# Altium PCB MiniPCB.PcbDoc (part 1 of 2)
Units mil, origin at the board's own origin, x right, y up, seen from the top; angles counter-clockwise.
Board outline 669.97 x 951.03 mil, 4 copper layers (Top Layer, GND, PWR, Bottom Layer), stack 30.2 mil thick; 100 components, 54 nets, 382 pads, 151 vias.
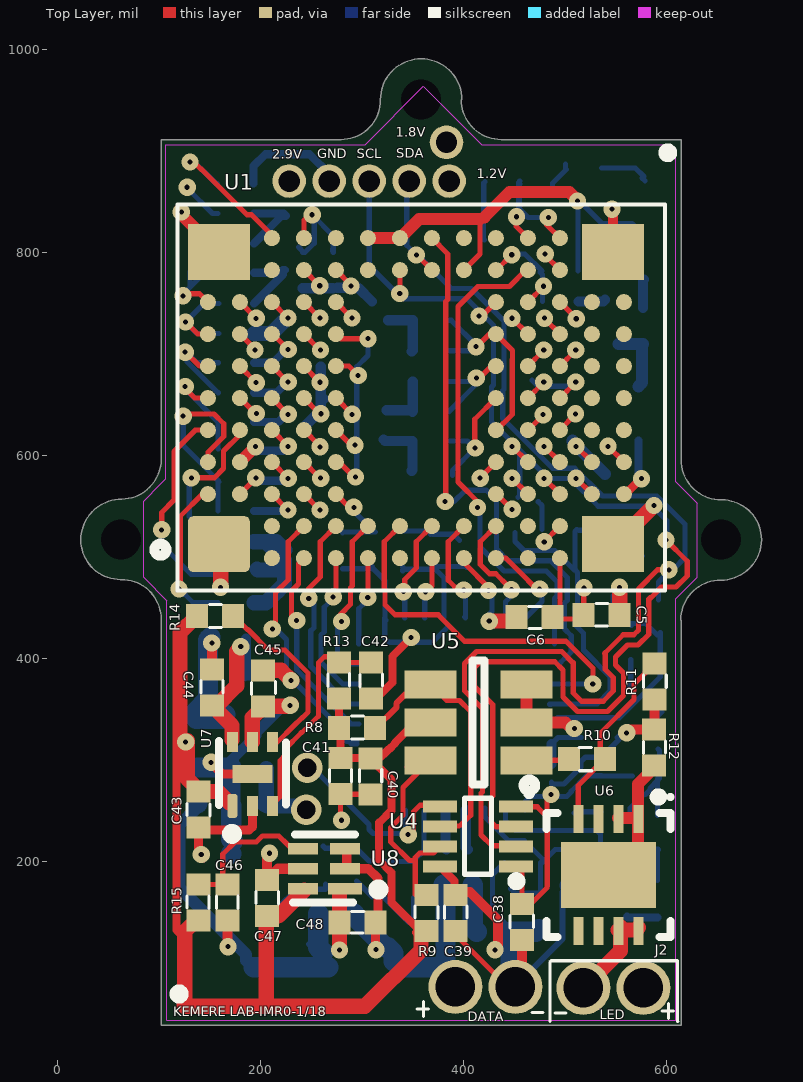
[diagram p0: Top Layer view]
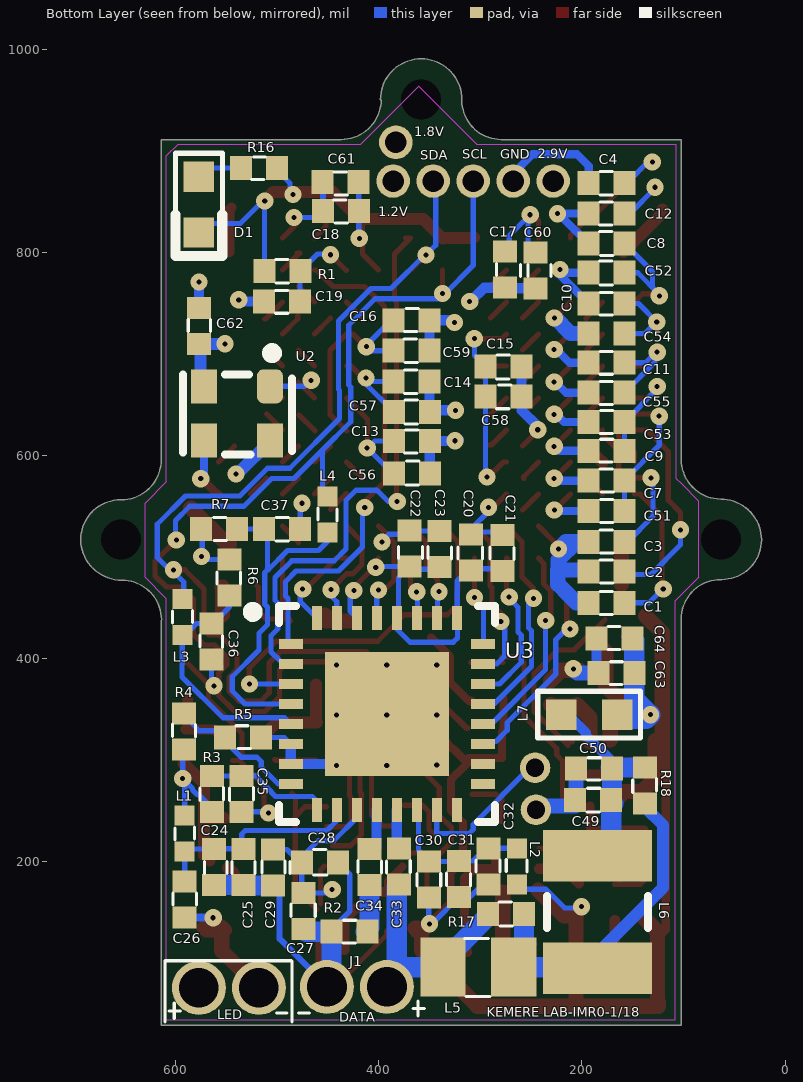
[diagram p1: Bottom Layer view, seen from below]
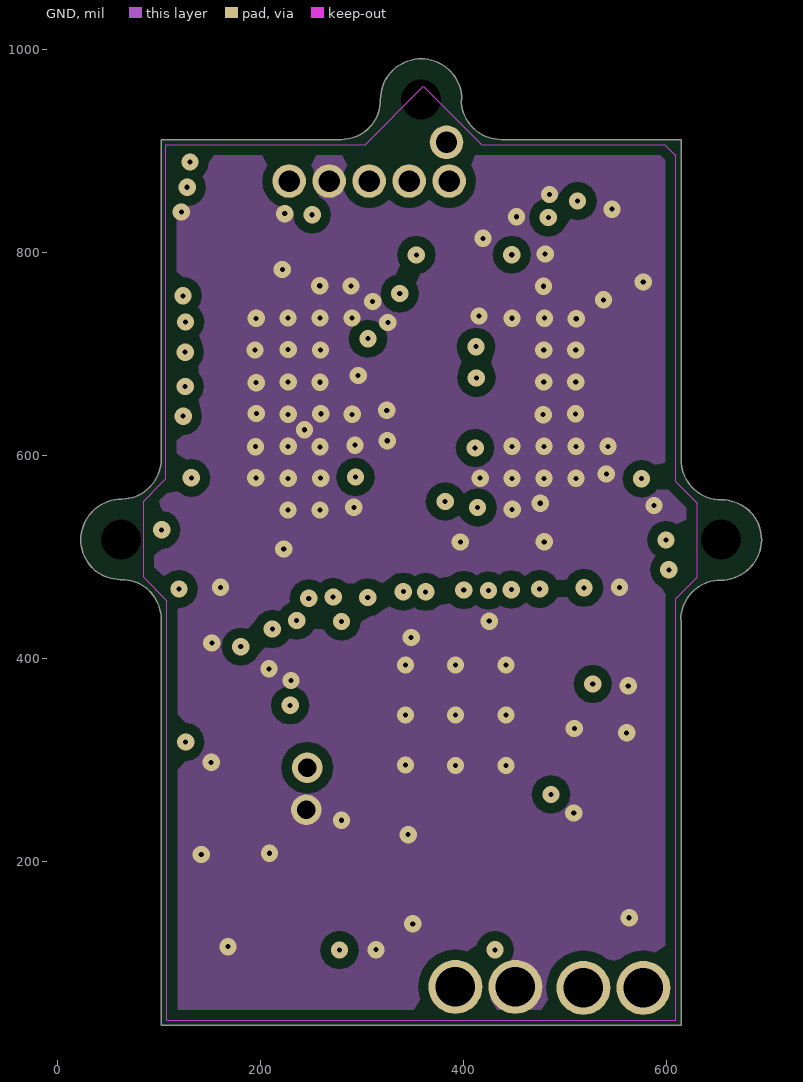
[diagram p2: GND]
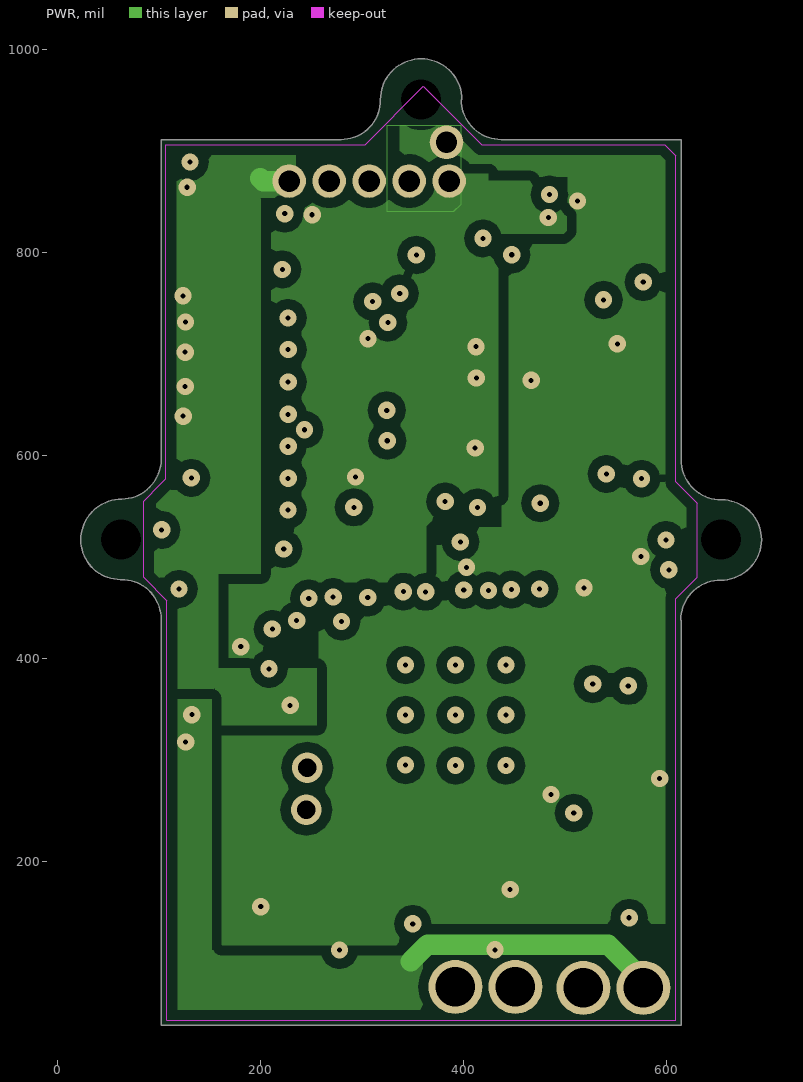
[diagram p3: PWR]

## Layer stack, top to bottom
Top Solder: solder mask 0.4, Solder Resist, Dk 3.5
Top Layer: signal copper 1.4
Dielectric1: core 6, FR-4 High TG, Dk 4.8
GND: signal copper 1.4
Dielectric2: prepreg 12.6, FR-4 High TG, Dk 4.8
PWR: signal copper 1.4
Dielectric3: core 6, FR-4 High TG, Dk 4.8
Bottom Layer: signal copper 1.4
Bottom Solder: solder mask 0.4, Solder Resist, Dk 3.5

## Board outline
62.32,477.95 63.33,477.95 cw(c63.33,438.92) 102.36,438.92 102.36,261.41 102.36,39.42 614.17,39.42 614.17,261.42 614.17,437.42 613.84,438.24 cw(c652.86,438.24) 652.86,477.27 ccw(c653.03,517.49) 693.25,517.32 ccw(c654.22,517.32) 654.22,556.35 653.54,556.35 cw(c653.54,595.72) 614.17,595.72 614.17,911.02 437.01,911.02 cw(c437.01,950.39) 397.64,950.39 398.32,950.4 ccw(c358.27,950.4) 358.27,990.45 ccw(c358.27,950.39) 318.21,950.39 318.21,949.71 cw(c279.53,949.71) 279.53,911.02 102.36,911.02 102.36,596.46 cw(c62.94,596.45) 63.5,557.03 ccw(c63.41,516.9) 23.28,516.98 ccw(c62.32,516.98)

## Design rules (kind name [scope] priority, off if disabled: settings)
Clearance "Polygon Pour Clearance" [InPolygon] p1: gap=10 ignorepadtopadclearanceinfootprint=FALSE
Clearance Clearance_1 [All] p2: gap=0 ignorepadtopadclearanceinfootprint=FALSE except(5: SMDPad-SMDPad SMDPad-THPad SMDPad-Via SMDPad-Hole THPad-THPad THPad-Via THPad-Hole Via-Via Via-Hole)
Clearance [All] p3: gap=5 ignorepadtopadclearanceinfootprint=FALSE except(10: Arc-Poly Track-Poly SMDPad-Poly THPad-Poly Via-Poly Fill-Poly Poly-Poly Poly-Region Poly-Hole)
ComponentClearance [All] p1: gap=5 collisioncheckmode=3 verticalgap=5 showdistances=TRUE
HoleSize [All] p1: absolutevalues=TRUE maxlimit=100 minlimit=5 maxpercent=80.000 minpercent=20.000
MatchedLengths [InNetClass('DIN[0..11]')] p1 off: tolerance=39.37 checknetsindiffpair=FALSE checkdiffpairvsdiffpair=TRUE checkxsignals=TRUE checkothers=TRUE
MinimumAnnularRing "PWR Annular Ring" [OnLayer('PWR')] p1: minimumring=7
MinimumAnnularRing "Layer Annular Ring" [OnLayer('GND')] p2: minimumring=7
MinimumAnnularRing [All] p3: minimumring=5
MinimumSolderMaskSliver [All] p1 off: minsoldermaskwidth=5
PolygonConnect [All] p1: thpad.connectstyle=Direct thpad.reliefconductorwidth=10 thpad.reliefentries=4 thpad.polygonreliefangle="90 Angle" thpad.airgapwidth=10 smdpad.connectstyle=Relief smdpad.reliefconductorwidth=10 smdpad.reliefentries=4 smdpad.polygonreliefangle="90 Angle" smdpad.airgapwidth=10 via.connectstyle=Direct via.reliefconductorwidth=10 via.reliefentries=4 via.polygonreliefangle="90 Angle" via.airgapwidth=10
RoomDefinition Serializer [InComponentClass('Serializer')] p1 off: confinementstyle=ConfineIn formatcopy=TRUE lockcomponents=FALSE outline -3327,-1970 -1327,-1970 -1327,-970 -3327,-970
RoomDefinition Power [InComponentClass('Power')] p2 off: confinementstyle=ConfineIn formatcopy=TRUE lockcomponents=FALSE outline -3327,-1970 -1327,-1970 -1327,-970 -3327,-970
RoomDefinition "LED Driver" [InComponentClass('LED Driver')] p3 off: confinementstyle=ConfineIn formatcopy=TRUE lockcomponents=FALSE outline -3327,-1970 -1327,-1970 -1327,-970 -3327,-970
RoomDefinition "CMOS Sensor" [InComponentClass('CMOS Sensor')] p4 off: confinementstyle=ConfineIn formatcopy=TRUE lockcomponents=FALSE outline -3327,-1970 -1327,-1970 -1327,-970 -3327,-970
RoutingVias [All] p1: holewidth=10 width=22 viastyle="Through Hole" minholewidth=5 minwidth=14 maxholewidth=28 maxwidth=50
SilkToSolderMaskClearance [IsPad] p1 off: minsilkscreentomaskgap=1 clearancetoexposedcopper=TRUE
SolderMaskExpansion [All] p1: expansion=1
UnConnectedPin [All] p1:
UnpouredPolygon [All] p1: allowunpoured=TRUE
Width [All] p1: maxlimit=100 minlimit=5 preferedwidth=10 minimp=50.000000 maximp=50.000000 favimp=50.000000
25 further rules are at their usual default settings.

## Classes and differential pairs
net class DIN[0..11]: DIN0 DIN1 DIN2 DIN3 DIN4 DIN5 DIN6 DIN7 DIN8 DIN9 DIN10 DIN11
component class Serializer: C20 C21 C22 C23 C24 C25 C26 C27 C28 C29 C30 C31 C32 C33 C34 C35 C36 C37 C49 C50 C63 C64 J1 L1 L2 L3 L4 L5 L6 L7 R2 R3 R4 R5 R6 R7 R17 R18 U3
component class Power: C42 C43 C44 C45 C46 C47 C48 D1 R13 R14 R15 R16 U7 U8
component class "LED Driver": C38 C39 C40 J2 R8 R9 R10 R11 R12 U4 U5 U6
component class "CMOS Sensor": C1 C2 C3 C4 C5 C6 C7 C8 C9 C10 C11 C12 C13 C14 C15 C16 C17 C18 C19 C51 C52 C53 C54 C55 C56 C57 C58 C59 C60 C61 C62 R1 U1 U2

## Components (designator, comment, footprint, x,y, rotation, side; value= is the part's Value field where it differs from the comment)
C1 "1uF" "SMD CAP 0402" 176,455 r180 bottom value=C?
C2 ".1uF" "SMD CAP 0402" 175.72,486 r180 bottom value=C?
C3 "1uF" "SMD CAP 0402" 175.72,515 r180 bottom value=C?
C4 ".22uF" "SMD CAP 0402" 175.72,868 r180 bottom value=C?
C5 ".01uF" "SMD CAP 0402" 536,443 r180 top value=C?
C6 "10uF" "SMD CAP 0402" 470,441 r0 top value=C?
C7 "4.7uF" "SMD CAP 0402" 175.98,575.2 r180 bottom value=C?
C8 "4.7uF" "SMD CAP 0402" 175.98,808.66 r180 bottom value=C?
C9 "4.7uF" "SMD CAP 0402" 176.02,604.32 r180 bottom value=C?
C10 "4.7uF" "SMD CAP 0402" 175.98,749.61 r180 bottom value=C?
C11 "1uF" "SMD CAP 0402" 175.98,691.34 r180 bottom value=C?
C12 "10uF" "SMD CAP 0402" 175.98,838.19 r180 bottom value=C?
C13 "1uF" "SMD CAP 0402" 367.52,614.17 r180 bottom value=C?
C14 "1uF" "SMD CAP 0402" 367.72,672.83 r180 bottom value=C?
C15 "4.7uF" "SMD CAP 0402" 277.17,687.4 r180 bottom value=C?
C16 "4.7uF" "SMD CAP 0402" 367.72,733.07 r180 bottom value=C?
C17 "4.7uF" "SMD CAP 0402" 275.92,782.9 r270 bottom value=C?
C18 "4.7uF" "SMD CAP 0402" 437.4,840.55 r180 bottom value=C?
C19 "1uF" "SMD CAP 0402" 495.28,751.57 r180 bottom value=C?
C20 "0.1uF" "SMD CAP 0402" 309.45,504.72 r90 bottom value=C?
C21 "0.01uF" "SMD CAP 0402" 278.35,503.94 r90 bottom value=C?
C22 "0.1uF" "SMD CAP 0402" 369.5,508.5 r90 bottom value=C?
C23 "0.01uF" "SMD CAP 0402" 340,508 r90 bottom value=C?
C24 "0.1uF" "SMD CAP 0402" 562.01,194.94 r270 bottom value=C?
C25 "0.01uF" "SMD CAP 0402" 533,195 r270 bottom value=C?
C26 "4.7uF" "SMD CAP 0402" 591,163 r270 bottom value=C?
C27 "0.1uF" "SMD CAP 0402" 474.26,151.77 r270 bottom value=C?
C28 "0.01uF" "SMD CAP 0402" 457.99,199.45 r180 bottom value=C?
C29 "4.7uF" "SMD CAP 0402" 504.2,194.54 r270 bottom value=C?
C30 "0.1uF" "SMD CAP 0402" 350.79,182.68 r270 bottom value=C?
C31 "0.01uF" "SMD CAP 0402" 321.26,183.07 r270 bottom value=C?
C32 "22uF" "SMD CAP 0402" 292.13,195.67 r270 bottom value=C?
C33 "0.1uF" "SMD CAP 0402" 380.32,195.28 r270 bottom value=C?
C34 "0.047uF" "SMD CAP 0402" 409.06,194.88 r270 bottom value=C?
C35 "1uF" "SMD CAP 0402" 535,267 r270 bottom value=C?
C36 ".01uF" "SMD CAP 0402" 564.5,417 r270 bottom value=C?
C37 ".01uF" "SMD CAP 0402" 495,527.5 r180 bottom value=C?
C38 ".1uF" "SMD CAP 0402" 457.4,140.8 r90 top value=C?
C39 "1uF" "SMD CAP 0402" 392.13,149.61 r270 top value=C?
C40 ".1uF" "SMD CAP 0402" 308.27,284.25 r270 top value=C?
C41 "1uF" "SMD CAP 0402" 278.74,284.65 r270 top value=C?
C42 "1uF" "SMD CAP 0402" 309.06,378.74 r270 top value=C?
C43 "4.7uF" "SMD CAP 0402" 138.98,251.57 r270 top value=C?
C44 "1uF" "SMD CAP 0402" 152.36,371.65 r90 top value=C?
C45 "1uF" "SMD CAP 0402" 202.52,370.83 r90 top value=C?
C46 "1uF" "SMD CAP 0402" 167.72,160.24 r270 top value=C?
C47 "4.7uF" "SMD CAP 0402" 206.69,164.57 r270 top value=C?
C48 "1uF" "SMD CAP 0402" 295.67,140.55 r180 top value=C?
C49 "4.7uF" "SMD CAP 0402" 189,261 r0 bottom value=C?
C50 ".1uF" "SMD CAP 0402" 188.19,291.73 r0 bottom value=C?
C51 ".1uF" "SMD CAP 0402" 175.98,545.28 r180 bottom value=C?
C52 ".1uF" "SMD CAP 0402" 175.98,779.92 r180 bottom value=C?
C53 ".1uF" "SMD CAP 0402" 175.98,633.07 r180 bottom value=C?
C54 ".1uF" "SMD CAP 0402" 175.98,720.08 r180 bottom value=C?
C55 ".1uF" "SMD CAP 0402" 175.98,661.81 r180 bottom value=C?
C56 ".01uF" "SMD CAP 0402" 367.36,582.48 r180 bottom value=C?
C57 ".01uF" "SMD CAP 0402" 367.44,642.87 r180 bottom value=C?
C58 ".1uF" "SMD CAP 0402" 277.17,657.87 r180 bottom value=C?
C59 ".1uF" "SMD CAP 0402" 367.72,703.15 r180 bottom value=C?
C60 ".1uF" "SMD CAP 0402" 245.72,782.18 r270 bottom value=C?
C61 ".1uF" "SMD CAP 0402" 437.72,869.41 r180 bottom value=C?
C62 ".01uF" "SMD CAP 0402" 576.77,727.56 r270 bottom value=C?
C63 "4.7uF" "SMD CAP 0402" 166.14,385.83 r0 bottom value=C?
C64 ".1uF" "SMD CAP 0402" 168,420 r0 bottom value=C?
D1 "LED 0603" LED_0603 577,847 r90 bottom
J1 "Coax Connector" "Coax Direct Solder ThroughHoles" 391.94,77 r270 bottom
J2 "Coax Connector" "Coax Direct Solder ThroughHoles" 577,76 r270 top
L1 "Ferrite Bead" "Ferrite Bead 402" 591,228 r270 bottom
L2 "Ferrite Bead" "Ferrite Bead 402" 264.17,195.67 r270 bottom
L3 "Ferrite Bead" "Ferrite Bead 402" 593,441 r270 bottom
L4 "Ferrite Bead" "Ferrite Bead 402" 450.5,542 r270 bottom
L5 "Ferrite Bead" CIG21L4R7MNE 301.97,96.46 r180 bottom
L6 "Ferrite Bead" CBC3225T101MR 184.65,150.79 r90 bottom
L7 "Ferrite Bead" BLM18KG601SN1D 193,345 r180 bottom
R1 "250K" "SMD RES 0402" 494.88,781.5 r0 bottom value=?
R2 "49.9" "SMD RES 0402" 428.87,131.31 r0 bottom value=?
R3 "100k" "SMD RES 0402" 564,267 r90 bottom value=?
R4 "10k" "SMD RES 0402" 591.5,328.5 r270 bottom value=?
R5 "100k" "SMD RES 0402" 533.5,322.5 r0 bottom value=?
R6 "1k" "SMD RES 0402" 547,480 r90 bottom value=?
R7 "1k" "SMD RES 0402" 557.13,527.57 r0 bottom value=?
R8 "1K" "SMD RES 0402" 294.88,331.89 r180 top value=?
R9 "1K" "SMD RES 0402" 363.39,149.61 r270 top value=?
R10 "4.02K" "SMD RES 0402" 521.34,301.41 r0 top value=?
R11 "1K" "SMD RES 0402" 588,377.5 r90 top value=?
R12 "10" "SMD RES 0402" 587.5,312.5 r270 top value=?
R13 "100k" "SMD RES 0402" 277.56,378.35 r270 top value=?
R14 "100k" "SMD RES 0402" 155.12,442.13 r180 top value=?
R15 "10k" "SMD RES 0402" 138.98,160.24 r270 top value=?
R16 "500" "SMD RES 0402" 518,883 r180 bottom value=?
R17 "1k" "SMD RES 0402" 274.8,148.82 r180 bottom value=?
R18 "1k" "SMD RES 0402" 138.19,275.2 r90 bottom value=?
U1 "SonyIMX290LLR-C" "110-LGA - Thin" 148.39,562.01 r0 top
U2 "DSC1001DI1-074.2500" CDFN 507.41,668.11 r270 bottom
U3 "DS90UR913A" "WQFN32 for DS90UB913A" 392.13,345.67 r180 bottom locked
U4 "MAX14595ETA+T" "8 TDFN" 451.57,195.28 r90 top
U5 "DAC5571IDBVR" TI-DBV6_M 414.57,337.4 r180 top
U6 "LT3092EDD#PBF" LT-DD-8_V 542.53,187.12 r270 top
U7 "SL9016IRUWKZ-T" UTDFN 172.44,255.12 r0 top
U8 "TPS72718DSER" DSE 283.46,173.62 r90 top

## Footprints (in the part's own frame and the unit in brackets; to place one, negate y for a bottom-side part, rotate by r counter-clockwise, add the part's x,y. Pads: shape width x height; smd on the part's side, far side on the other; paste and mask are expansions set on the pad)
"8 TDFN" [mm]
  rect 0.3x0.85 smd: 1(0,0) 2(0.5,0) 3(1,0) 4(1.5,0) 5(1.5,1.9) 6(1,1.9) 7(0.5,1.9) 8(0,1.9)
  silkscreen extent -0.39,-0.02 1.71,1.29, body extent -0.32,-0.01 1.83,1.9, height 0.8
"110-LGA - Thin" [mm]
  rrect20% 1.55x1.4 smd: 1-A1(0.275,-1.25)
  round 0.4 smd: 2-A3(0,0) 3-A4(0,0.8) 4-A5(0,1.6) 5-A6(0,2.4) 6-A7(0,3.2) 7-A8(0,4) 8-A9(0,4.8) 10-B3(0.8,0) 11-B4(0.8,0.8) 12-B5(0.8,1.6) 13-B6(0.8,2.4) 14-B7(0.8,3.2) 15-B8(0.8,4) 16-B9(0.8,4.8) 17-C1(1.6,-1.6) 18-C2(1.6,-0.8) 19-C3(1.6,0) 20-C4(1.6,0.8) 21-C5(1.6,1.6) 22-C6(1.6,2.4) 23-C7(1.6,3.2) 24-C8(1.6,4) 25-C9(1.6,4.8) 26-C10(1.6,5.6) 27-C11(1.6,6.4) 28-D1(2.4,-1.6) 29-D2(2.4,-0.8) 30-D3(2.4,0) 31-D4(2.4,0.8) 32-D5(2.4,1.6) 33-D6(2.4,2.4) 34-D7(2.4,3.2) 35-D8(2.4,4) 36-D9(2.4,4.8) 37-D10(2.4,5.6) 38-D11(2.4,6.4) 39-E1(3.2,-1.6) 40-E2(3.2,-0.8) 41-E3(3.2,0) 42-E4(3.2,0.8) 43-E5(3.2,1.6) 44-E6(3.2,2.4) 45-E7(3.2,3.2) 46-E8(3.2,4) 47-E9(3.2,4.8) 48-E10(3.2,5.6) 49-E11(3.2,6.4) 50-F1(4,-1.6) 51-F2(4,-0.8) 53-F10(4,5.6) 54-F11(4,6.4) 55-G1(4.8,-1.6) 56-G2(4.8,-0.8) 56-G10(4.8,5.6) 57-G11(4.8,6.4) 58-H1(5.6,-1.6) 59-H2(5.6,-0.8) 60-H10(5.6,5.6) 61-H11(5.6,6.4) 62-J1(6.4,-1.6) 63-J2(6.4,-0.8) 64-J10(6.4,5.6) 65-J11(6.4,6.4) 66-K1(7.2,-1.6) 67-K2(7.2,-0.8) 68-K3(7.2,0) 69-K4(7.2,0.8) 70-K5(7.2,1.6) 71-K6(7.2,2.4) 72-K7(7.2,3.2) 73-K8(7.2,4) 74-K9(7.2,4.8) 75-K10(7.2,5.6) 76-K11(7.2,6.4) 77-L1(8,-1.6) 78-L2(8,-0.8) 79-L3(8,0) 80-L4(8,0.8) 81-L5(8,1.6) 82-L6(8,2.4) 83-L7(8,3.2) 84-L8(8,4) 85-L9(8,4.8) 86-L10(8,5.6) 87-L11(8,6.4) 88-M1(8.8,-1.6) 89-M2(8.8,-0.8) 90-M3(8.8,0) 91-M4(8.8,0.8) 92-M5(8.8,1.6) 93-M6(8.8,2.4) 94-M7(8.8,3.2) 95-M8(8.8,4) 96-M9(8.8,4.8) 97-M10(8.8,5.6) 98-M11(8.8,6.4) 99-N3(9.6,0) 100-N4(9.6,0.8) 101-N5(9.6,1.6) 102-N6(9.6,2.4) 103-N7(9.6,3.2) 104-N8(9.6,4) 105-N9(9.6,4.8) 107-P3(10.4,0) 108-P4(10.4,0.8) 109-P5(10.4,1.6) 110-P6(10.4,2.4) 111-P7(10.4,3.2) 112-P8(10.4,4) 113-P9(10.4,4.8)
  rect 1.55x1.4 smd: 9-A11(0.275,6.05) 106-P1(10.125,-1.25) 114-P11(10.125,6.05)
  silkscreen extent -1.29,-2.41 11.43,7.24, body extent -0.7,-2.37 11.38,7.18, height 0.1
BLM18KG601SN1D [mil]
  rect 30x30 smd: 1(-27.5,0) 2(27.5,0)
  silkscreen extent -50,-23 50,23, body extent -32,-15 32,15, height 19
CBC3225T101MR [mm]
  rect 1.29x2.72 smd: 1(-1.405,0) 2(1.405,0)
  silkscreen extent -0.4,-1.26 0.4,1.26, body extent -1.7,-1.35 1.7,1.35, height 2.7
CDFN [mm]
  rrect50% 0.85x0.65 smd: 1(0,0.008)
  rect 0.85x0.65 smd: 2(1.35,0.008) 3(1.35,-1.642) 4(0,-1.642)
  silkscreen extent -0.95,-2.17 1.7,0.56, body extent -0.3,-2.1 1.7,0.4, height 1.45
CIG21L4R7MNE [mm]
  rect 1.13x1.47 smd: 1(-0.885,0) 2(0.885,0)
  body extent -1.1,-0.72 1.1,0.72, height 1.05
"Coax Direct Solder ThroughHoles" [mil]
  round 53 hole 39 mask+0: 0(0,0) 1(0,-59.06)
DSE [mm]
  rect 0.28x0.85 smd: 1(0,0)
  rect 0.28x0.75 smd: 2(0.5,0) 3(1,0) 4(1,1.05) 5(0.5,1.05) 6(0,1.05)
  silkscreen extent -0.35,-0.96 1.35,1.3, body extent -0.24,-0.26 1.3,1.28, height 1.45
"Ferrite Bead 402" [mm]
  rect 0.5x0.5 smd: 1(-0.45,0) 2(0.45,0)
  body extent -0.53,-0.28 0.53,0.28, height 0.5
LED_0603 [mil]
  rect 30x30 smd: A(-27.5,0) C(27.5,0)
  silkscreen extent -50,-23 50,23, body extent -32,-15 32,15, height 20
LT-DD-8_V [mm]
  rect 0.7x0.25 smd mask+0.102: 1(-1.4,0.75) 2(-1.4,0.25) 3(-1.4,-0.25) 4(-1.4,-0.75) 5(1.4,-0.75) 6(1.4,-0.25) 7(1.4,0.25) 8(1.4,0.75)
  rect 1.65x2.38 smd mask+0.102: 9(0,0)
  silkscreen extent -2,-1.55 1.55,1.6, body extent -1.5,-1.5 1.5,1.5, height 0.8
"SMD CAP 0402" [mm]
  rect 0.55x0.6 smd: 0(-0.45,0) 1(0.45,0)
  body extent -0.53,-0.28 0.53,0.28, height 0.5
"SMD RES 0402" [mm]
  rect 0.55x0.6 smd: 0(-0.45,0) 1(0.45,0)
  body extent -0.53,-0.28 0.53,0.28, height 0.5
TI-DBV6_M [mm]
  rect 1.3x0.7 smd: 1(-1.2,0.95) 2(-1.2,0) 3(-1.2,-0.95) 4(1.2,-0.95) 5(1.2,0) 6(1.2,0.95)
  silkscreen extent -1.35,-1.55 0.15,1.86, body extent -0.87,-1.52 0.87,1.53, height 1.45
UTDFN [mm]
  rrect50% 0.25x0.6 smd: 1(0,0)
  rect 0.28x0.5 smd: 2(0.5,0) 3(1,0) 4(1,1.6) 5(0.5,1.6) 6(0,1.6)
  rect 1x0.45 smd: 7(0.5,0.8)
  silkscreen extent -0.34,-0.82 1.34,1.62, body extent -0.29,0.01 1.31,1.61, height 1.45
"WQFN32 for DS90UB913A" [mm]
  rect 0.6x0.25 smd mask+0: 1(-2.4,1.75) 2(-2.4,1.25) 3(-2.4,0.75) 4(-2.4,0.25) 5(-2.4,-0.25) 6(-2.4,-0.75) 7(-2.4,-1.25) 8(-2.4,-1.75) 17(2.4,-1.75) 18(2.4,-1.25) 19(2.4,-0.75) 20(2.4,-0.25) 21(2.4,0.25) 22(2.4,0.75) 23(2.4,1.25) 24(2.4,1.75)
  rect 0.25x0.6 smd mask+0: 9(-1.75,-2.4) 10(-1.25,-2.4) 11(-0.75,-2.4) 12(-0.25,-2.4) 13(0.25,-2.4) 14(0.75,-2.4) 15(1.25,-2.4) 16(1.75,-2.4) 25(1.75,2.4) 26(1.25,2.4) 27(0.75,2.4) 28(0.25,2.4) 29(-0.25,2.4) 30(-0.75,2.4) 31(-1.25,2.4) 32(-1.75,2.4)
  rect 3.1x3.1 smd paste-4: 33(0,0)
  silkscreen extent -3.48,-2.7 2.7,2.7, body extent -2.55,-2.55 2.55,2.55, height 0.8

## Part data
C1 C2 C3 C4 C5 C6 C7 C8 C9 C10 C11 C12 C13 C14 C15 C16 C17 C18 C19 C20 C21 C22 C23 C24 C25 C26 C27 C28 C29 C30 C31 C32 C33 C34 C35 C36 C37 C38 C39 C40 C41 C42 C43 C44 C45 C46 C47 C48 C49 C50 C51 C52 C53 C54 C55 C56 C57 C58 C59 C60 C61 C62 C63 C64: library part Capacitor
D1: "LTST_C195TBJRKT"
R1 R2 R3 R4 R5 R6 R7 R8 R9 R10 R11 R12 R13 R14 R15 R16 R17 R18: library part Resistor
U1: library part IMX290LLR-C, "Sony Image Sensor"
U2: library part "Microchip Oscillator", "74.25MHz Oscillator"
U3: "DS90UR913ASERIALIZER"
U4: "Level Translator"
U5: "Low-Power, 8-Bit DAC with High-Speed I2C Input, -40 to 105 degC, 6-pin SOT23 (DBV6), Green (RoHS & no Sb/Br)", Manufacturer="Texas Instruments", Power Consumption(Typ)(mW)=0.4, Supplier Part Number 1=DAC5571IDBVR-ND, Code_JEDEC=MO-178, ComponentLink1Description="Manufacturer URL", ComponentLink1URL=http://www.ti.com/, ComponentLink2Description=Datasheet, ComponentLink2URL=http://www.ti.com/general/docs/lit/getliterature.tsp?genericPartNumber=DAC5571&fileType=pdf, ComponentLink3Description="Package Specification", ComponentLink3URL=http://www.ti.com/litv/pdf/mpds026h, DAC Channels=1, DatasheetVersion=SLAS405A, DNL(Max)(+/-LSB)=0.25, Eco-Plan="Green (RoHS & no Sb/Br)", INL(Max)(+/-LSB)=1, Interface="Serial I2C", Mounting Technology="Surface Mount", PackageDescription="6-Pin Plastic Small Outline, Body 1.6 x 2.9 mm, Pitch 0.95 mm", PackageReference=DBV6, PackageVersion="4073253-5/K, 03/2006", PartNumber=DAC5571IDBVR, Resolution(Bits)=8, Settling Time(us)=8, SubFamily="Precision DAC (=<10MSPS)", Supplier 1=Digi-Key, Supplier 2=Mouser, Supplier Part Number 2=595-DAC5571IDBVR
U6: "200 mA Two-Terminal Programmable Current Source, 0.3 mA Isupply, 8-pin SON (DD-8), -40 to 125 degC, Pb-Free", Extended Temp="E, I, MP", Manufacturer="Linear Technology", Output Current Range="0.5 mA to 200 mA", Supplier Part Number 1=LT3092EDD#PBF-ND, Code_JEDEC=MO-229, ComponentLink1Description="Manufacturer URL", ComponentLink1URL=http://www.linear.com/, ComponentLink2Description=Datasheet, ComponentLink2URL=http://cds.linear.com/docs/en/datasheet/3092fb.pdf, ComponentLink3Description="Package Specification", ComponentLink3URL=http://cds.linear.com/docs/en/packaging/DFN_8_05-08-1698.pdf, DatasheetVersion="Rev. B", Initial Accuracy(%)=1, Isupply(mA)=0.3, Mounting Technology="Surface Mount", PackageDescription="8-Pin Plastic DFN, Body 3 x 3 mm, Pitch 0.5 mm", PackageReference=DD-8, PackageVersion=Jun-10, PartNumber=LT3092EDD#PBF, RoHS=TRUE, Supplier 1=Digi-Key, Supplier 2=Farnell, Supplier 3=Newark, Supplier Part Number 2=2295468, Supplier Part Number 3=72R5810, Vin Max(V)=40, Vin Min(V)=1.2
U8: "Single 1.8V Linear Regulator"

## Free pads (board coordinates)
  round 33 hole 21: 1(228.35,870.08) 1(267.72,870.08) 2(307.09,870.08) 3(346.46,870.08) 3(383.2,908.31) 3(385.83,870.08)
  round 30 hole 18: 3(245.28,251.4) 3(246.16,292.75)
  round 0 hole 39.37 unplated: NA(62.99,517.32) NA(358.27,950.39) NA(653.54,517.32)

## Via types
v1: diameter 17, hole 5, Top Layer to GND, tented both sides, 41 vias
v2: diameter 17, hole 5, Top Layer to Bottom Layer, tented both sides, 39 vias
v3: diameter 17, hole 5, GND to Bottom Layer, tented bottom, 18 vias
v4: diameter 17, hole 5, Top Layer to GND, tented top, 16 vias
v5: diameter 17, hole 5, GND to Bottom Layer, 11 vias
v6: diameter 17, hole 5, Top Layer to Bottom Layer, tented top, 8 vias
v7: diameter 17, hole 5, PWR to Bottom Layer, tented bottom, 7 vias
v8: diameter 17, hole 5, Top Layer to PWR, 4 vias
v9: diameter 17, hole 5, Top Layer to GND, 3 vias
v10: diameter 17, hole 5, Top Layer to PWR, tented top, 3 vias
v11: diameter 17, hole 5, PWR to Bottom Layer, 1 vias

## Nets (pads, with @x,y where several pads share a name; then routed paths per layer and width w, separated by ;. In a path a pad name is that pad's centre, name@x,y a point inside that pad or via, vN(x,y) a via of type N, cw(c..) or ccw(c..) an arc to the next point about the centre after c; other vN are vias at no path point)
"1.2V VDD": C13.0 C14.0 C15.0 C16.0 C17.0 C18.0 C44.0 C56.0 C57.0 C58.0 C59.0 C60.0 C61.0 pad.3@385.83,870.08 U1.38-D11 U1.42-E4 U1.46-E8 U1.70-K5 U1.71-K6 U1.72-K7 U1.73-K8 U1.98-M11 U7.6 | length 974.8
  Top Layer w5.12: U1.38-D11@242.88,813.98 242.88,831.53 248.35,837 v2(251,837) ; U1.42-E4@274.37,593.51 277.35,593.51 291.54,579.32 v2@291.54,578.16 ; U1.46-E8@274.37,719.49 278.91,714.96 v2(305.91,714.96) ; v2@292.13,578.74 v2(293.55,578.74) ; v2@411.02,608.27 411.02,635.68 U1.71-K6@431.85,656.5 ; v2(411.42,607.48) v2@414.33,607.48 ; v2@412.6,706.69 425.4,719.49 U1.73-K8@431.85,719.49 448.03,703.31 448.03,694.5 447.92,694.39 447.92,640.44 U1.70-K5@431.5,624.02 ; v2@414.57,675.2 427.36,687.99 U1.72-K7@431.85,687.99 ; v2@481.89,835.83 481.89,826.95 U1.98-M11@494.85,813.98
  Top Layer w15: U7.6@172.05,320.08 172.05,334.25 C44.0@152.36,353.94 157.24,353.94 176.67,373.37 176.67,407.2 v8@180.75,411.27
  Bottom Layer w5.12: C60.0@237.4,805.12 C60.0@242.52,800 ; C60.0@241.73,800 C60.0@242.52,800 ; v2(251,837) 271.65,816.35 C17.0@271.65,800 ; v2@252,835 253,834 253,809 244,800 C60.0@242.52,800 ; C17.0@271.26,801.18 C17.0@271.26,803.15 ; v2@289.12,578.92 294.88,584.68 C58.0@294.88,657.87 C15.0@294.88,687.4 305.91,698.43 v2(305.91,714.96) ; C57.0@385.16,642.87 412.99,670.71 v2@412.99,676.38 ; C13.0@385.24,614.17 403.94,614.17 v2@411.02,607.09 ; C14.0@385.43,672.83 v2@409.84,672.83 ; C59.0@385.43,703.15 408.27,703.15 v2(412.2,707.09) v2@413.78,708.66 ; C16.0@385.43,733.07 387.8,733.07 v2@412.6,708.27 ; C56.0@389.25,580.43 389.25,585.32 v2@411.02,607.09 ; v2@411.57,606.54 v2@411.02,607.09 ; v2@413.19,676.18 v2@413.39,676.38 ; C18.0@454.33,840.94 454.72,840.94 C18.0@455.12,840.55 C18.0@455.12,842.52 ; C18.0@454.33,843.31 C18.0@455.12,842.52 ; C61.0@455.22,870.27 455.12,870.17 C61.0@455.12,867.72 ; C18.0@455.51,845.67 C18.0@455.12,846.06 ; C61.0@455.51,867.32 C61.0@455.12,867.72 ; v2(483.46,834.25) 463.39,834.25 C18.0@455.12,842.52 ; C18.0@455.12,842.52 C18.0@455.12,846.06 ; C18.0@455.12,846.06 454.33,846.85 454.33,868.5 C61.0@455.12,867.72 ; C18.0@455.12,846.06 C61.0@455.12,867.72
  other v2: 412.6,676.38
  other v8: 180.71,411.81
"1.8V VDD": C5.1 C6.1 C20.0 C21.0 C22.0 C23.0 C27.0 C28.0 C29.0 C38.1 C48.1 C62.1 D1.A L1.1 L2.2 pad.3@383.2,908.31 R1.1 R3.0 R4.1 R6.1 R7.1 U1.54-F11 U1.57-G11 U1.64-J10 U1.88-M1 U2.1 U2.4 U3.11 U3.25 U3.28 U4.1 U4.4 U8.1 | length 1642.4
  Top Layer w5.12: U1.64-J10@400.36,782.48 416.14,798.26 416.14,832.76 416.14,833.14 419,836 ; U4.1@439.62,193.31 U4.1@441.73,193.31 ; U4.4@451.57,254.33 472.44,254.33 482,244.77 ; U4.1@453.5,196 457.4,192.1 C38.1@457.4,158.52 ; C38.1@460.7,153.3 482,174.6 ; 482.28,176.38 482.28,244.49 482,244.77 ; v10@485.5,267.5 482,264 482,244.77 ; C6.1@487,437 C6.1@489,439 ; C6.1@487.72,439 C6.1@489,439 ; U1.88-M1@494.85,499.02 494.85,444.85 C6.1@489,439 ; v2@511.34,851.26 v2(512.2,850.39) ; C5.1@517,445 511,439 C6.1@489,439 ; C5.1@518.28,443 518.28,470.17 v8@519.56,471.44
  Top Layer w11.81: U1.54-F11@306.5,814.5 307.02,813.98 U1.57-G11@337.37,813.98 ; U1.57-G11@337,813.5 356.26,832.76 416.14,832.76 ; 420.5,834.5 445.12,859.12 504.25,859.12 v2@512.78,850.59
  Top Layer w15: U8.1@277.95,170.47 C48.1@277.95,140.55 277.95,113.33 v10@278.37,112.91
  Bottom Layer w5: U3.28@380.6,440.4 380.6,457.13 380.65,457.18 380.65,479.63 C22.0@369.5,490.78 402.22,490.78 v7(403,489.97)
  Bottom Layer w5.12: v7@200,154.72 216.93,154.72 235.35,173.15 264.17,173.15 L2.2@264.17,177.95 ; C21.0@280.71,488.58 C20.0@308.27,488.58 ; C20.0@309.65,489.96 C20.0@310.24,490.55 ; C20.0@311.42,488.19 322.68,476.93 322.68,440.39 322.44,440.16 U3.25@322.44,436.61 ; U3.25@323.62,437.8 U3.25@322.44,436.61 ; C23.0@339.76,487.01 C23.0@340.16,486.61 ; C23.0@340,490.28 342.28,488 C22.0@369.5,488 ; U3.28@383.07,429.92 369.29,416.14 326.77,416.14 322.44,420.47 U3.25@322.44,436.61 ; U3.11@421,253 421,244.1 444.23,220.87 459.69,220.87 C28.0@478.41,202.15 ; v7@446.5,173.56 450.58,169.48 C27.0@474.26,169.48 ; v7@467.5,674 473.39,668.11 U2.1@507.09,668.11 U2.1@507.09,670.08 ; C27.0@473.87,168.75 475.71,170.59 C28.0@475.71,197.7 ; C28.0@475.71,199.45 C28.0@475.71,197.7 ; C29.0@504.2,212.25 490.26,212.25 C28.0@475.71,197.7 ; R1.1@512.6,781.5 v2@512.6,850.39 ; v2@513.19,851.38 536.28,828.28 565.72,828.28 D1.A@575,819 ; R6.1@547,497.72 572.32,497.72 v7@575.8,501.19 ; R3.0@568.78,249.28 R3.0@564,249.28 564,253 577.33,266.33 578.94,266.33 583.37,270.76 583.37,272.37 v7@591,280 ; v7@573.72,501.19 R7.1@573.72,527.5 ; L1.1@591,245.72 v7@591,280 ; v7@591,281 591,282 v7@592,283 ; R4.1@591.5,311 593,309.5 v7(593,282) ; v7@592,281 v7@591,280
  Bottom Layer w11.81: v7@552.69,709.71 552.82,709.84 C62.1@575.59,709.84 ; U2.4@572.05,668.11 575.59,671.65 C62.1@575.59,709.84 ; C62.1@576.77,709.84 C62.1@575.59,709.84
  other v7: 200.39,155.91 445.87,172.8 574.44,500.68 466.5,673.97 551.4,709.93
  other v8: 518.46,469.8
  other v10: 277.89,113.18 486.06,266.43
"2.9V VDD": C7.1 C8.1 C9.1 C10.1 C11.1 C12.1 C45.0 C51.1 C52.1 C53.1 C54.1 C55.1 pad.1@228.35,870.08 U1.3-A4 U1.5-A6 U1.6-A7 U1.7-A8 U1.8-A9 U7.5 | length 785.8
  Top Layer w5.12: v2@121.67,759.28 v2@122.27,759.28 ; v2@122.27,758.74 122.81,759.28 140.11,759.28 U1.8-A9@148.39,750.99 ; v2@126,641 154.22,641 164,631.22 164,618.79 148.39,603.18 U1.3-A4@148.39,593.51 ; v2(126,668) 126,666 135.5,656.5 U1.5-A6@148.39,656.5 ; v2@126.16,701.84 140.01,687.99 U1.6-A7@148.39,687.99 ; v2(126.38,731.5) 138.38,719.49 U1.7-A8@148.39,719.49
  Top Layer w15: U7.5@192.13,318.11 192.13,342.13 C45.0@203.12,353.12 ; C45.0@205,355 C45.0@203.12,353.12 ; v10@230.76,354.61 229.26,353.12 C45.0@203.12,353.12
  PWR w20: 200,873 202.92,870.08 pad.1@228.35,870.08
  Bottom Layer w5.12: v2@123.11,757.9 145.13,779.92 C52.1@158.27,779.92 ; v2(124.02,638.71) 124.02,609.73 C7.1@156.55,577.21 ; v2@126,671 v2(126,668) 126,665.34 C53.1@158.27,633.07 158.27,606.3 C9.1@158.47,606.5 ; v2@128,863 152.81,838.19 C12.1@158.27,838.19 ; 130.71,766.12 130.71,781.1 C8.1@158.27,808.66 ; C51.1@158.27,545.28 158.27,573.27 C7.1@159,574 ; C7.1@158.27,575.2 C7.1@158.66,575.2 ; C55.1@158.66,661.81 C55.1@158.27,661.81 128,692.08 128,701 137.66,691.34 C11.1@158.27,691.34 C11.1@158.66,691.34 ; C54.1@159.06,720.08 C54.1@158.27,720.08 137.8,720.08 v2(126.38,731.5) 144.49,749.61 C10.1@158.27,749.61 C10.1@159.06,749.61
  other v2: 126.02,701.71 123.83,757.19 128,864
  other v10: 229.35,354.11
DIN0: U1.29-D2 U3.19 | length 265.5
  Top Layer w5.12: v2@214.96,435.43 214.96,465.13 227.45,477.62 227.45,515.08 U1.29-D2@242.88,530.51
  Bottom Layer w5.12: v2(211.81,429.13) 215.36,429.13 225.71,418.78 225.71,384.92 273.62,337.01 273.62,329.53 284.65,318.5 U3.19@294.88,318.5 ; U3.19@289.11,316.14 U3.19@294.88,316.14
DIN1: U1.28-D1 U3.20 | length 198.2
  Top Layer w5.12: v2@230.71,439.37 230.63,439.45 230.63,466.49 237.57,473.43 237.57,493.71 U1.28-D1@242.88,499.02
  Bottom Layer w5.12: v2@230.71,438.98 v2@231.89,440.16 ; v2@235.83,437.8 235.83,389.11 289.11,335.83 U3.20@296.85,335.83
  other v2: 235.71,437.58
DIN2: U1.40-E2 U3.21 | length 205.8
  Top Layer w5.12: 247.64,469.02 258.94,480.32 258.94,515.08 U1.40-E2@274.37,530.51
  Bottom Layer w5.12: v2@246.85,459.45 252.72,453.58 252.72,430.54 249.69,427.51 249.69,392.31 286.48,355.51 U3.21@296.85,355.51
  other v2: 247.64,459.45
DIN3: U1.39-E1 U3.22 | length 158.6
  Top Layer w5.12: v2@270.08,459.84 274.37,464.14 U1.39-E1@274.37,499.02 U1.39-E1@272.83,497.49
  Bottom Layer w5.12: v2@272.05,461.02 272.05,459.81 262.83,450.59 262.83,426.35 259.8,423.32 259.8,396.5 281.1,375.2 U3.22@296.85,375.2
  other v2: 271.65,460.63
DIN4: U1.51-F2 U3.23 | length 167.5
  Top Layer w5.12: v2@278.74,435.04 278.74,443.66 288.66,453.58 288.66,469.87 290.44,471.65 290.44,515.08 U1.51-F2@305.87,530.51
  Bottom Layer w5.12: v2@275.98,439.37 275.98,402.76 283.86,394.88 U3.23@296.85,394.88
  other v2: 279.92,436.61
DIN5: U1.50-F1 U3.24 | length 86.6
  Top Layer w5.12: v2@305.87,456.57 U1.50-F1@305.87,499.02
  Bottom Layer w5.12: U3.24@296.85,414.57 296.93,414.65 296.93,443.66 296.85,443.74 296.85,449.21 v2@303.54,455.91
  other v2: 305.67,460.24
DIN6: U1.59-H2 U3.26 | length 109.9
  Top Layer w5.12: v2@341.08,462.46 342.13,463.5 342.13,477.95 353.43,489.26 353.43,515.08 U1.59-H2@368.86,530.51 U1.59-H2@368.86,528.31
  Bottom Layer w5.12: v2@339.79,467.36 342.13,465.02 U3.26@342.13,440.16
  other v2: 340.69,465.96
DIN7: U1.58-H1 U3.27 | length 62.4
  Top Layer w5.12: v2@361.59,464.38 368.86,471.66 U1.58-H1@368.86,499.02
  Bottom Layer w5.12: U3.27@361.81,440.16 v2@361.81,464.87
  other v2: 362.7,465.86
DIN8: U1.63-J2 U3.29 | length 104.9
  Top Layer w5.12: v2@396.06,466.04 384.93,477.17 384.93,515.08 U1.63-J2@400.36,530.51
  Bottom Layer w5.12: U3.29@401.09,441.03 U3.29@401.97,440.16 401.97,467.98 v2@401.72,468.22
  other v2: 400.22,467.69
DIN9: U1.62-J1 U3.30 | length 70
  Top Layer w5.12: U1.62-J1@400.36,499.02 400.36,494.38 426.15,468.59 v2@426.15,467.02
  Bottom Layer w5.12: U3.30@421.65,440.16 427.99,446.5 v2@427.99,464.87
  other v2: 424.5,467.09
DIN10: U1.67-K2 U3.31 | length 117.8
  Top Layer w5.12: U1.67-K2@431.85,524.77 U1.67-K2@431.85,530.51 416.42,515.08 416.42,492.63 425.46,483.59 431.76,483.59 v2@443.7,471.65
  Bottom Layer w5.12: U3.31@441.34,440.16 441.34,456.14 v2@452.5,467.3
  other v2: 447,468
DIN11: U1.66-K1 U3.32 | length 94.1
  Top Layer w5.12: U1.66-K1@431.85,499.02 441.53,499.02 456.96,483.59 469.45,471.1 v2@475.1,471.1 ; v2@470.28,468.7 v2@471.85,468.7 ; v2@471.26,469.29 v2@471.85,468.7 ; v2(474.9,468.7) v2@471.85,468.7
  Bottom Layer w5.12: U3.32@461.02,440.16 477.2,456.33 v2@477.2,467.3